# Altium PCB mos-drive.PcbDoc
Units mm, origin at the board's own origin, x right, y up, seen from the top; angles counter-clockwise.
Board outline 56.9 x 47.7 mm, 2 copper layers (Top Layer, Bottom Layer); 41 components, 27 nets, 114 pads, 22 vias.
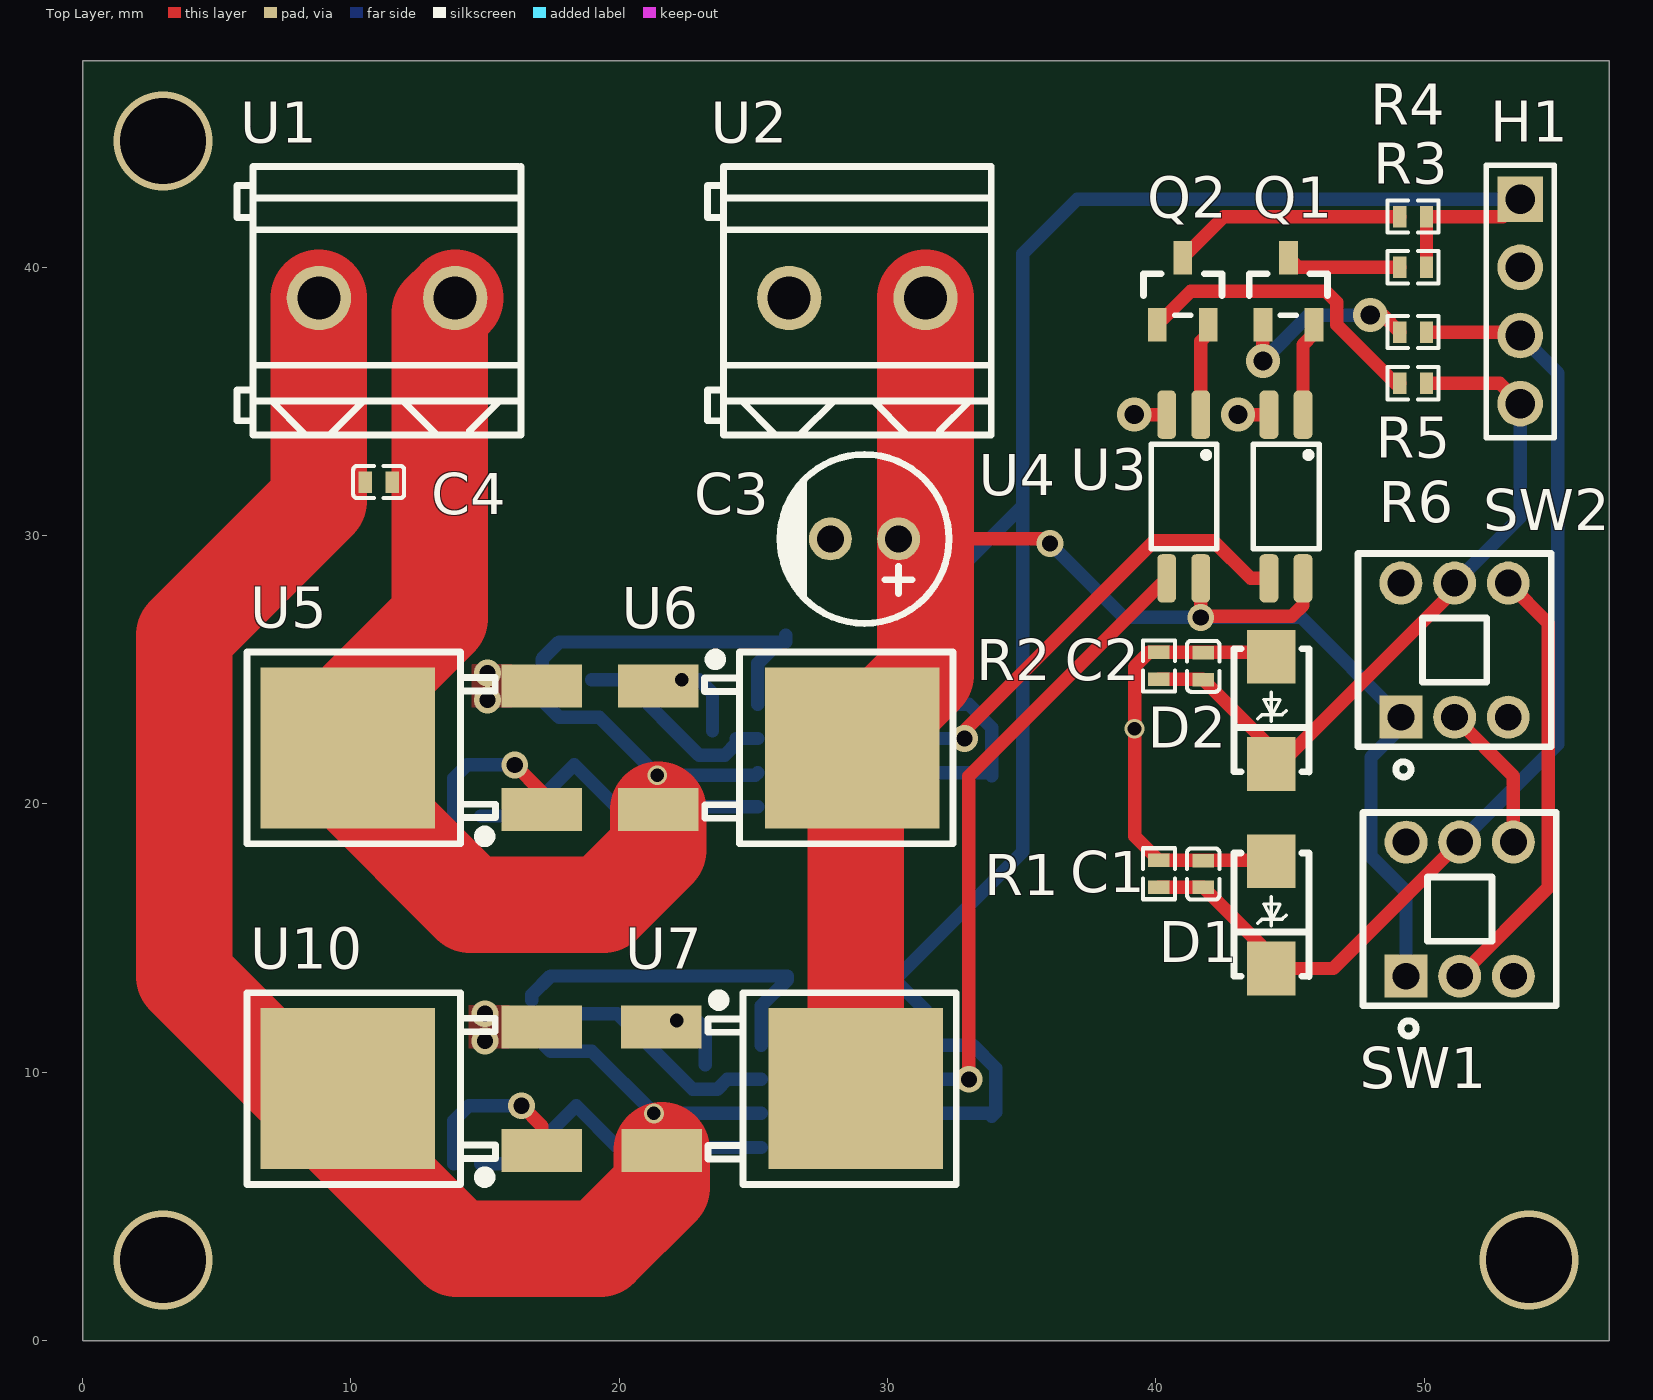
[diagram p0: Top Layer view]
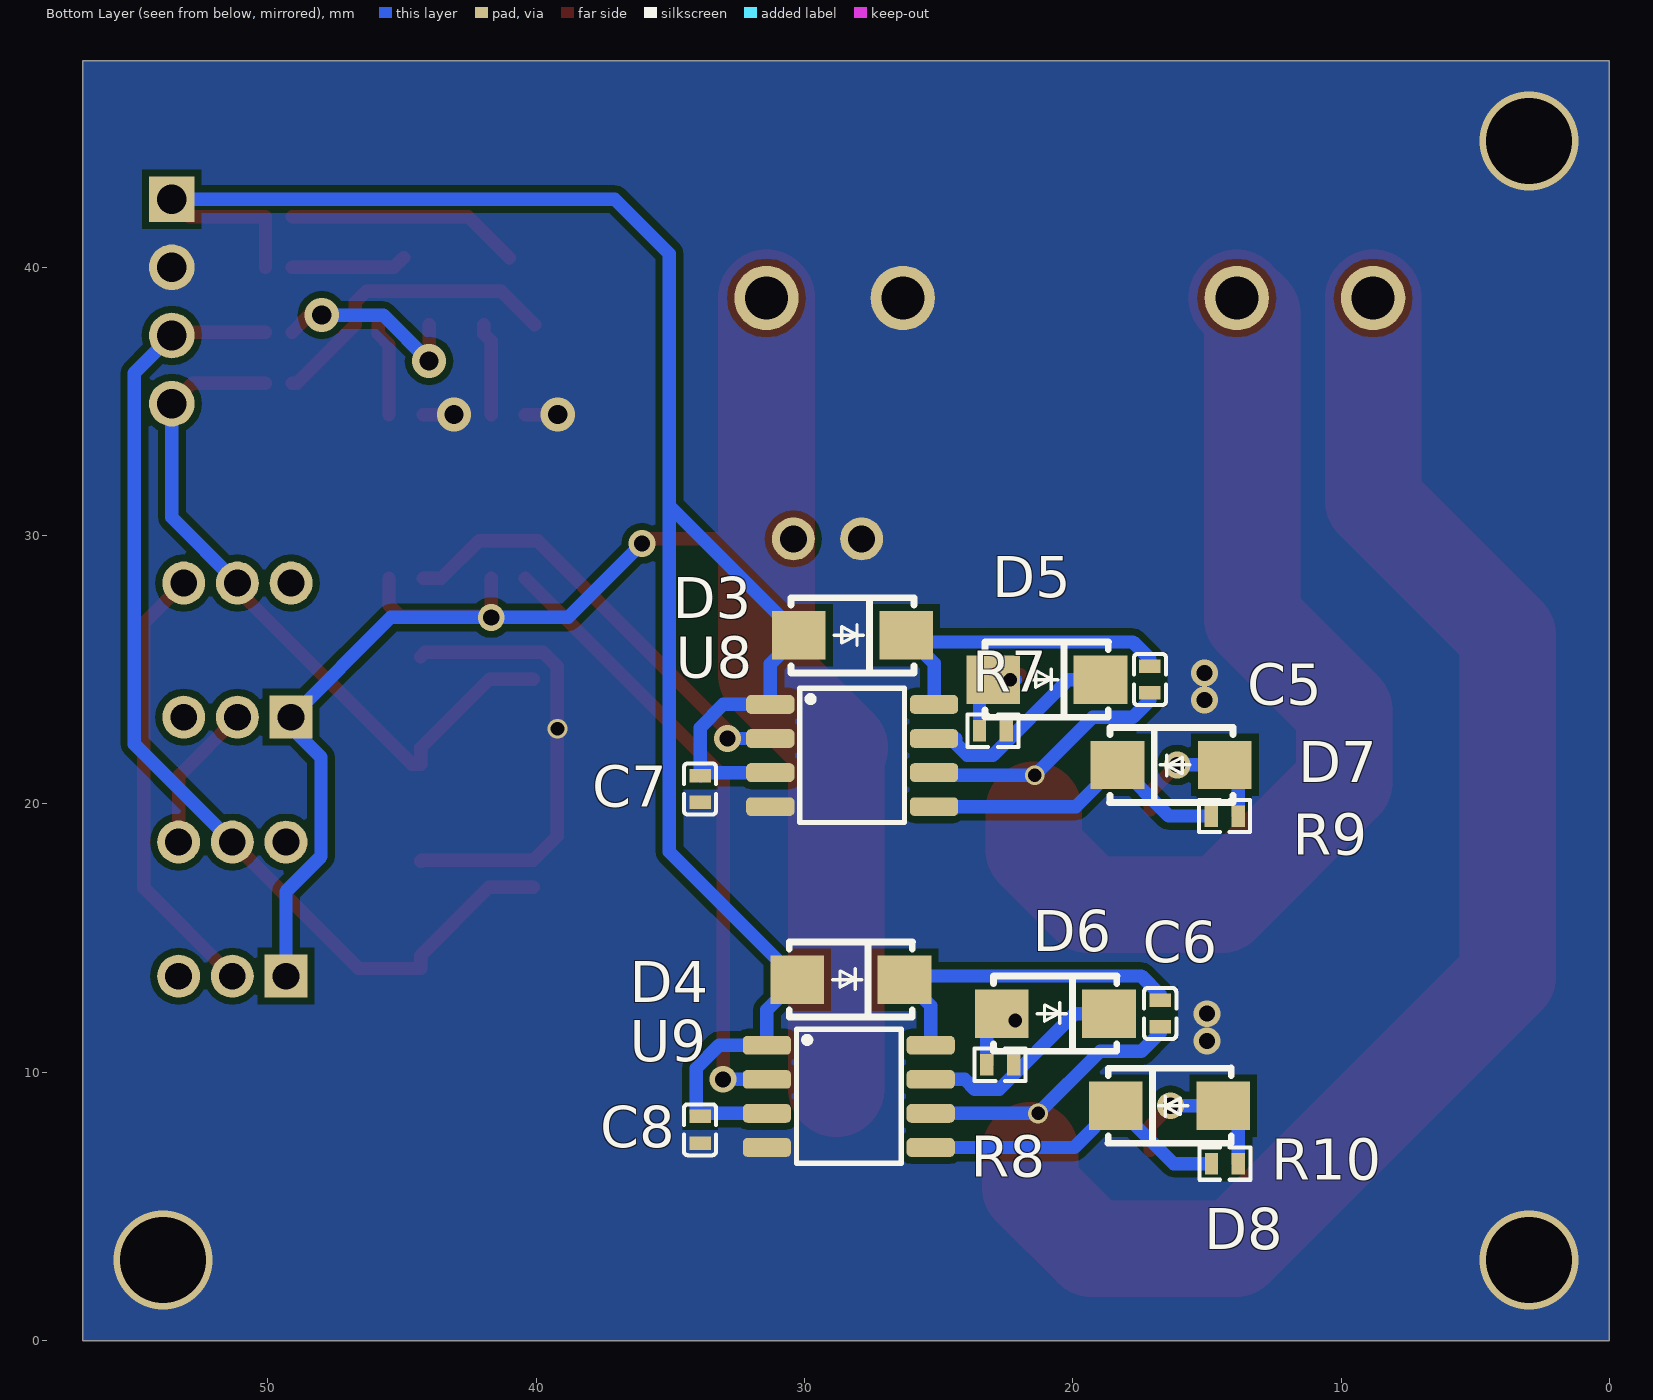
[diagram p1: Bottom Layer view, seen from below]
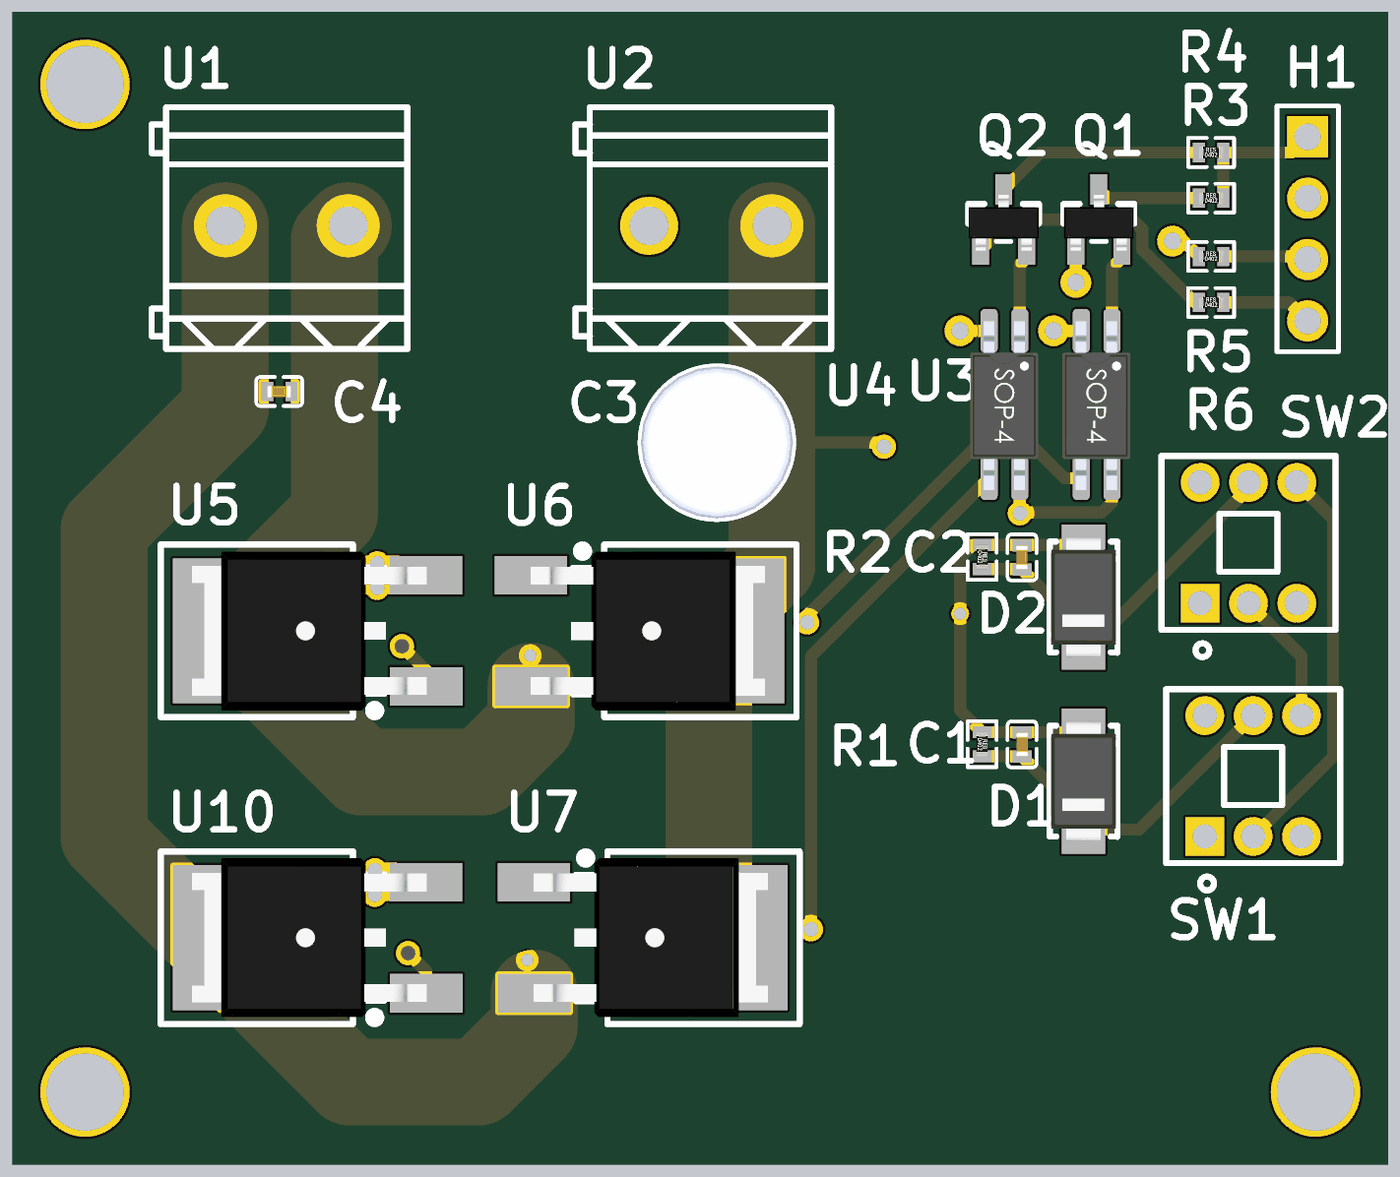
[diagram p2: 3D render of the assembled board from above, using the file's embedded part models]
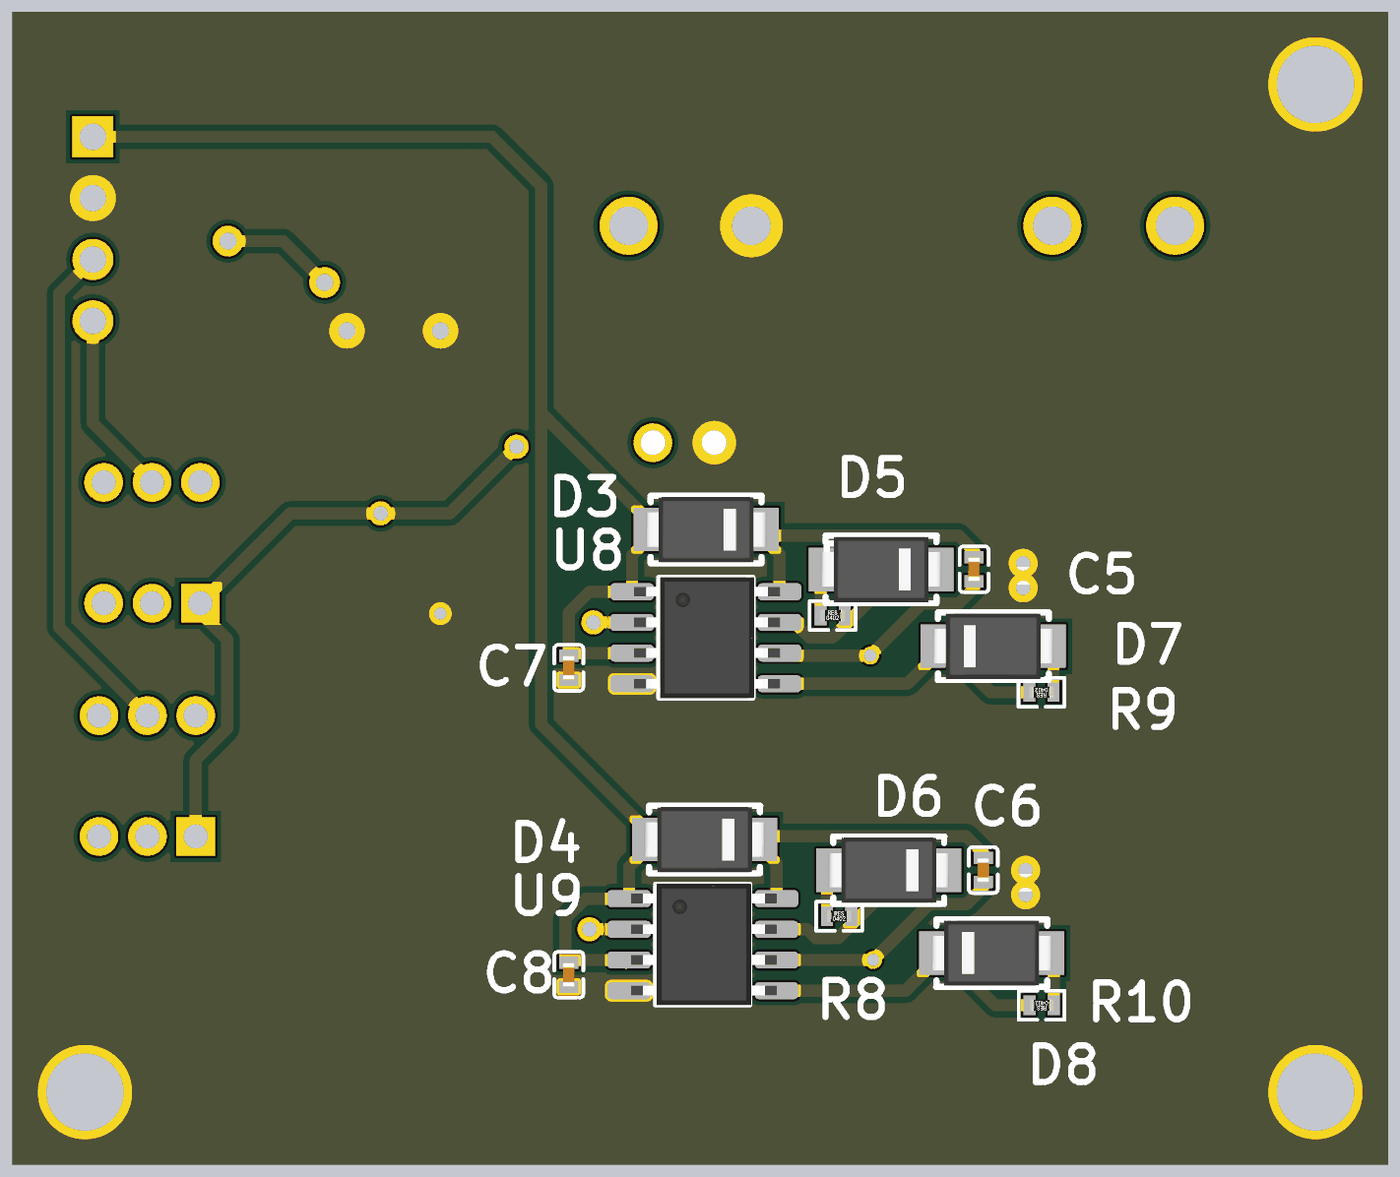
[diagram p3: 3D render of the assembled board from below, using the file's embedded part models]

## Layer stack, top to bottom
Top Solder: solder mask 0.0102, Solder Resist, Dk 3.5
Top Layer: signal copper 0.0356
Dielectric 1: dielectric 0.32, FR-4, Dk 4.8
Bottom Layer: signal copper 0.0356
Bottom Solder: solder mask 0.0102, Solder Resist, Dk 3.5

## Board outline
0,0 0,47.7 56.9,47.7 56.9,0

## Design rules (kind name [scope] priority, off if disabled: settings)
Clearance [All] p1: gap=0.254 ignorepadtopadclearanceinfootprint=FALSE except(0: Arc-Hole Track-Hole SMDPad-Hole THPad-Hole Via-Hole Fill-Hole Poly-Hole Region-Hole Text-Hole)
PolygonConnect [All] p1: connectstyle=Direct reliefconductorwidth=0.254 reliefentries=4 polygonreliefangle="90 Angle" airgapwidth=0.254
RoutingVias [All] p1: holewidth=0.711 width=1.27 viastyle="Through Hole" minholewidth=0.1 minwidth=0.1 maxholewidth=0.711 maxwidth=1.27
SolderMaskExpansion [All] p1: expansion=0.102
Width [All] p1: maxlimit=10 minlimit=0.254 preferedwidth=0.5
30 further rules are at their usual default settings.

## Components (designator, comment, footprint, x,y, rotation, side; value= is the part's Value field where it differs from the comment)
C1 "0.1uf" C0402 41.762,17.388 r90 top
C2 "0.1uf" C0402 41.762,25.127 r270 top
C3 "100uf 35v" 100uf-35v 29.189,29.834 r180 top
C4 "0.1uf" C0402 11.036,31.993 r0 top
C5 "1uf" C0402 17.124,24.635 r270 bottom
C6 "1uf" C0402 16.743,12.189 r270 bottom
C7 "0.1uf" C0402 33.888,20.555 r270 bottom
C8 "0.1uf" C0402 33.888,7.855 r270 bottom
D1 "SMAJ16A-TP" SMAJ16A-TP 44.302,15.864 r90 top
D2 "SMAJ16A-TP" SMAJ16A-TP 44.302,23.484 r90 top
D3 "FR107" SMA_L4.4-W2.6-LS5.0-RD 28.205,26.278 r0 bottom
D4 "FR107" SMA_L4.4-W2.6-LS5.0-RD 28.268,13.451 r0 bottom
D5 "1N4007" SMA_L4.4-W2.6-LS5.0-RD 20.966,24.627 r0 bottom
D6 "1N4007" SMA_L4.4-W2.6-LS5.0-RD 20.648,12.181 r0 bottom
D7 "1N4007" SMA_L4.4-W2.6-LS5.0-RD 16.33,21.452 r180 bottom
D8 "1N4007" SMA_L4.4-W2.6-LS5.0-RD 16.394,8.752 r180 bottom
H1 "2.54 4p" "2.54 4p" 53.573,42.534 r270 top
Q1 "FHT9014Y-ME" SOT-23-3_L2.9-W1.3-P1.90-LS2.4-BR 44.937,39.105 r270 top
Q2 "FHT9014Y-ME" SOT-23-3_L2.9-W1.3-P1.90-LS2.4-BR 41,39.105 r270 top
R1 "10k" R0402 40.111,17.396 r270 top
R2 "10k" R0402 40.111,25.143 r270 top
R3 "10k" R0402 49.581,39.994 r0 top
R4 "10k" R0402 49.581,41.883 r0 top
R5 "10k" R0402 49.581,37.581 r0 top
R6 "10k" R0402 49.581,35.676 r0 top
R7 "10k" R0402 22.974,22.722 r180 bottom
R8 "10k" R0402 22.704,10.276 r180 bottom
R9 "10k" R0402 14.338,19.547 r0 bottom
R10 "10k" R0402 14.33,6.593 r0 bottom
SW1 "XKB7070-W" SW-TH_6P-L7.2-W7.2-P2.00-LS5.0 51.319,15.577 r0 top
SW2 "XKB7070-W" SW-TH_6P-L7.2-W7.2-P2.00-LS5.0 51.128,25.229 r0 top
U1 "DB128L-5.08-2P" CONN-TH_2P-P5.08_DB128L-5.08-2P 11.155,38.851 r0 top
U2 "DB128L-5.08-2P" CONN-TH_2P-P5.08_DB128L-5.08-2P 28.681,38.851 r0 top
U3 "IS2801" SOP-4 46.08,29.453 r180 top
U4 "IS2801" SOP-4 42.27,29.453 r180 top
U5 "RU6070L-A" TO252 9.885,22.087 r90 top
U6 "RU6070L-A" TO252 28.681,22.087 r270 top
U7 "RU6070L-A" TO252 28.808,9.387 r270 top
U8 "EG2104" SOP-8 27.919,21.706 r270 bottom
U9 "EG2104" SOP-8 28.046,9.006 r270 bottom
U10 "RU6070L-A" TO252 9.885,9.387 r90 top

## Footprints (in the part's own frame and the unit in brackets; to place one, negate y for a bottom-side part, rotate by r counter-clockwise, add the part's x,y. Pads: shape width x height; smd on the part's side, far side on the other; paste and mask are expansions set on the pad)
"2.54 4p" [mm]
  rect 1.7x1.7 hole 1.1: 1(0,0)
  round 1.7 hole 1.1: 2(2.54,0) 3(5.08,0) 4(7.62,0)
  silkscreen extent -1.27,-1.27 8.89,1.27
100uf-35v [mm]
  round 1.6 hole 1: 1(-1.22,-0.04) 2(1.32,-0.04)
  silkscreen extent -3.1,-3.19 3.22,3.11, body extent -3.1,-3.2 3.2,3.1, height 11
C0402 [mm]
  rect 0.5x0.8 smd: 1(-0.5,0) 2(0.5,0)
  silkscreen extent -0.95,-0.6 0.95,0.6, body extent -0.5,-0.25 0.5,0.25, height 0.48
CONN-TH_2P-P5.08_DB128L-5.08-2P [mm]
  round 2.4 hole 1.6: 1(-2.347,0) 2(2.733,0)
  silkscreen extent -5.4,-5.1 5.18,4.9
R0402 [mm]
  rect 0.5x0.8 smd: 1(-0.5,0) 2(0.5,0)
  silkscreen extent -0.95,-0.6 0.95,0.6, body extent -0.5,-0.25 0.5,0.25, height 0.35
SMA_L4.4-W2.6-LS5.0-RD [mm]
  rect 2x1.8 smd: 1(-2,0) 2(2,0)
  silkscreen extent -2.3,-1.4 2.3,1.4, body extent -2.5,-1.35 2.5,1.35, height 2.27
SMAJ16A-TP [mm]
  rect 2x1.8 smd: 1(-2,0) 2(2,0)
  silkscreen extent -2.3,-1.4 2.3,1.4, body extent -2.5,-1.35 2.5,1.35, height 2.27
SOP-4 [mm]
  rrect50% 0.7x1.8 smd: 1(0.6,-5.05) 2(1.87,-5.05) 3(1.87,1.05) 4(0.6,1.05)
  silkscreen extent 0,-3.95 2.45,-0.05, body extent -0.15,-5.45 2.65,1.55, height 2.1
SOP-8 [mm]
  rrect50% 0.7x1.8 smd: 1(-2,-3.35) 2(-0.73,-3.35) 3(0.54,-3.35) 4(1.81,-3.35) 5(1.81,2.75) 6(0.54,2.75) 7(-0.73,2.75) 8(-2,2.75)
  silkscreen extent -2.6,-2.25 2.4,1.65, body extent -2.61,-3.27 2.41,2.77, height 3.15
SOT-23-3_L2.9-W1.3-P1.90-LS2.4-BR [mm]
  rect 1.25x0.7 smd: 1(1.25,-0.95) 2(1.25,0.95) 3(-1.25,0)
  silkscreen extent -0.65,-1.46 0.9,1.46, body extent -1.4,-1.45 1.28,1.45, height 1.35
SW-TH_6P-L7.2-W7.2-P2.00-LS5.0 [mm]
  rect 1.6x1.6 hole 1: 1(-2,-1.999)
  round 1.6 hole 1: 2(0,-1.999) 3(2,-1.999) 4(-2,3.001) 5(0,3.001) 6(2,3.001)
  silkscreen extent -3.6,-4.23 3.6,4.1
TO252 [mil]
  rect 62.99x118.1 smd: 1(-90.55,-284.8)
  rect 236.2x255.9 smd: 2(0,0)
  rect 63x118.2 smd: 3(90.5,-284.55)
  silkscreen extent -141,-216 141,148, body extent -130,-285 130,96, height 91

## Part data
C1 C2 C4 C5 C6 C7 C8: library part 0402F104M500NT
R1 R2 R3 R4 R5 R6 R7 R8 R9 R10: library part MFR0S2F1001A20

## Via types
v1: diameter 1, hole 0.6, Top Layer to Bottom Layer, 10 vias
v2: diameter 0.737, hole 0.508, Top Layer to Bottom Layer, 5 vias
v3: diameter 1.27, hole 0.711, Top Layer to Bottom Layer, 4 vias
v4: diameter 3.7, hole 3.2, Top Layer to Bottom Layer, 3 vias

## Nets (pads, with @x,y where several pads share a name; then routed paths per layer and width w, separated by ;. In a path a pad name is that pad's centre, name@x,y a point inside that pad or via, vN(x,y) a via of type N, cw(c..) or ccw(c..) an arc to the next point about the centre after c; other vN are vias at no path point)
5v: C7.1 C8.1 D3.2 D4.2 H1.1 R3.2 R4.2 U8.1 U8.3 U9.1 U9.3 | length 81.8
  Top Layer w0.5: R3.2 R4.2 52.922,41.883 H1.1
  Bottom Layer w0.5: U8.3 33.777,21.166 C7.1 33.888,22.84 33.022,23.706 U8.1 31.269,25.214 D3.2 35.031,31.104 ; U9.3@31.507,8.355 U9.3 33.777,8.466 C8.1 34.035,8.502 34.035,10.152 33.181,11.006 U9.1 31.396,12.323 D4.2 35.031,18.214 35.031,31.104 ; H1.1 37.063,42.534 35.031,40.502 35.031,31.104
GND: C1.2 C2.1 C3.2 C7.2 C8.2 D1.2 D2.2 H1.2 R1.1 R2.1 U2.1 U3.2 U4.2 U5.3 U8.4 U9.4 U10.3 | length 19.5
  Top Layer w0.5: v3(39.192,34.503) U4.2 ; R2.1@39.73,25.643 39.207,25.12 39.207,18.8 R1.1 44.27,17.896 D1.2 ; R2.1@39.748,25.643 R2.1 44.143,25.643 D2.2 ; v3(43.062,34.503) U3.2
  other v1: 14.992,11.165 14.992,12.181 15.092,23.865 15.092,24.881
  other v2: 39.2,22.8
  other v4: 3,3 53.9,3 3,44.7
IN1: U3.3 U8.2 | length 16.8
  Top Layer w0.5: v1(32.872,22.436) 32.872,22.735 39.944,29.807 42.126,29.807 43.53,28.403 U3.3
  Bottom Layer w0.5: U8.2 v1(32.872,22.436)
IN2: U4.3 U9.2 | length 23.4
  Top Layer w0.5: v1(33.031,9.736) 33.031,21.034 U4.3
  Bottom Layer w0.5: U9.2 v1(33.031,9.736)
MOTOR1: C4.2 C5.2 U1.2 U5.2 U6.3 U8.6 | length 45
  Top Layer w3.6: U1.2 13.314,38.277 13.314,26.913 9.885,23.484 U5.2 9.885,20.815 14.455,16.245 19.41,16.245 21.453,18.288 U6.3
  Bottom Layer w0.5: C5.2 17.124,23.856 17.757,23.223 19.258,23.223 v2(21.417,21.064) 25.067,21.064 U8.6
MOTOR2: C4.1 C6.2 U1.1 U7.3 U9.6 U10.2 | length 61.7
  Top Layer w3.6: U1.1 8.808,31.297 3.789,26.278 3.789,13.578 13.949,3.418 19.283,3.418 21.58,5.715 U7.3
  Bottom Layer w0.5: C6.2 16.743,11.473 17.439,10.777 18.982,10.777 v2(21.293,8.466) U9.6
NetC5_1: C5.1 D3.1 U8.8 | length 12.5
  Bottom Layer w0.5: C5.1 17.124,25.398 17.757,26.031 D3.1@25.958,26.031 ; U8.8 25.169,25.242 D3.1@25.958,26.031 ; D3.1 26.205,26.031 D3.1@25.958,26.031
NetC6_1: C6.1 D4.1 U9.8 | length 13
  Bottom Layer w0.5: C6.1 16.743,12.889 17.439,13.585 26.268,13.585 D4.1 25.296,12.479 U9.8
NetD5_1: D5.1 R7.2 U8.7 | length 7.7
  Bottom Layer w0.5: D5.1 20.165,24.627 22.974,21.818 23.933,21.818 24.363,22.248 24.363,22.436 U8.7
NetD5_2: D5.2 R7.1 U6.1 | length 3.2
  Top Layer w0.5: U6.1@21.95,24.82 U6.1@22.143,24.627
  Bottom Layer w0.5: D5.2@22.143,24.627 D5.2 23.474,24.119 R7.1
  other v2: 22.331,24.627
NetD6_1: D6.1 R8.2 U9.7 | length 8
  Bottom Layer w0.5: D6.1 19.936,12.181 22.745,9.372 23.663,9.372 24.027,9.736 U9.7
NetD6_2: D6.2 R8.1 U7.1 | length 2.1
  Bottom Layer w0.5: D6.2 23.204,11.625 R8.1
  other v2: 22.143,11.927
NetD7_1: D7.1 R9.2 U8.5 | length 11.8
  Bottom Layer w0.5: R9.2 16.425,19.547 D7.1 19.886,19.896 U8.5
NetD7_2: D7.2 R9.1 U5.1 | length 6
  Top Layer w0.5: v1(16.108,21.452) 17.119,20.441 U5.1
  Bottom Layer w0.5: R9.1 13.838,20.96 D7.2 v1(16.108,21.452)
NetD8_1: D8.1 R10.2 U9.5 | length 12
  Bottom Layer w0.5: R10.2 16.235,6.593 D8.1 19.95,7.196 U9.5
NetD8_2: D8.2 R10.1 U10.1 | length 6.3
  Top Layer w0.5: v1(16.362,8.752) 17.119,7.995 U10.1
  Bottom Layer w0.5: R10.1 13.83,8.188 D8.2 v1(16.362,8.752)
NetQ1_1: Q1.1 R5.1 | length 7.4
  Top Layer w0.5: v3(43.987,36.504) Q1.1 ; v3(47.985,38.216) 48.446,38.216 R5.1
  Bottom Layer w0.5: v3(43.987,36.504) 45.699,38.216 v3(47.985,38.216)
NetQ1_2: Q1.2 U3.1 | length 3.5
  Top Layer w0.5: U3.1 45.48,37.108 45.887,37.515 Q1.2
NetQ1_3: Q1.3 R3.1 | length 4.3
  Top Layer w0.5: Q1.3 45.298,39.994 R3.1
NetQ2_1: Q2.1 R6.1 | length 11.5
  Top Layer w0.5: Q2.1 41.3,39.105 46.325,39.105 46.741,38.689 46.741,37.849 48.914,35.676 R6.1
NetQ2_2: Q2.2 U4.1 | length 3.5
  Top Layer w0.5: U4.1 41.67,37.235 41.95,37.515 Q2.2
NetQ2_3: Q2.3 R4.1 | length 8.7
  Top Layer w0.5: Q2.3 42.528,41.883 R4.1
NetSW1_2: SW1.2 SW2.6 | length 16.6
  Top Layer w0.5: SW1.2 54.623,16.882 54.623,26.735 SW2.6
NetSW1_6: SW1.6 SW2.2 | length 5.6
  Top Layer w0.5: SW2.2 53.319,21.039 SW1.6
OUT1: C1.1 D1.1 H1.3 R1.2 R5.2 SW1.5 | length 39.2
  Top Layer w0.5: R1.2 41.754,16.896 C1.1 44.302,14.348 D1.1 46.605,13.864 SW1.5 ; R5.2 53.446,37.581 H1.3
  Bottom Layer w0.5: SW1.5 54.97,22.229 54.97,36.057 H1.3
OUT2: C2.2 D2.1 H1.4 R2.2 R6.2 SW2.5 | length 26.9
  Top Layer w0.5: R2.2 41.746,24.643 C2.2 44.302,22.087 D2.1 44.636,21.484 SW2.5@51.128,27.976 ; R6.2 52.811,35.676 H1.4
  Bottom Layer w0.5: SW2.5 53.573,30.675 H1.4
VCC: C3.1 SW1.1 SW2.1 U2.2 U3.4 U4.4 U6.2 U7.2 | length 68.4
  Top Layer w0.5: 31.414,29.874 35.88,29.874 v1(36.047,29.707) ; U4.4 v1(41.67,26.948) 41.71,26.988 45.064,26.988 45.48,27.404 U3.4
  Top Layer w3.6: U7.2 28.808,21.96 U6.2 31.414,24.82 31.414,29.874 U2.2
  Bottom Layer w0.5: v1(36.047,29.707) 38.806,26.948 v1(41.67,26.948) 45.41,26.948 SW2.1 49.319,23.039 48.015,21.735 48.015,18.038 49.319,16.734 SW1.1
pads on no net: SW1.3 SW1.4 SW2.3 SW2.4

## Polygon pours and split planes (outlines as drawn)
no net on Top Layer (solid, pour order 34): 15.5,12.5
GND on Top Layer (solid, pour order 32): 15.9,12.5 14.4,12.5 14.4,10.9 15.9,10.9
GND on Top Layer (solid, pour order 26): 16,25.2 14.5,25.2 14.5,23.6 16,23.6
no net on Top Layer (solid, pour order 24): 15.6,25.2
GND on Bottom Layer (solid, remove dead copper, pour order 35): 0,47.7 0,0 56.9,0 56.9,47.7

## Other copper
Bottom Layer:
  pour cut-out: 30.671,7.854

## Silkscreen, mask and mechanical layers (free items; w line width, h text height)
Mechanical 1:
  the board outline again, w0.1